# Altium PCB PCB7.pcbdoc
Units mil, origin at the board's own origin, x right, y up, seen from the top; angles counter-clockwise.
Board outline 1393.1 x 1140 mil, 2 copper layers (Top Layer, Bottom Layer); 2 components, 13 nets, 24 pads, 2 vias.
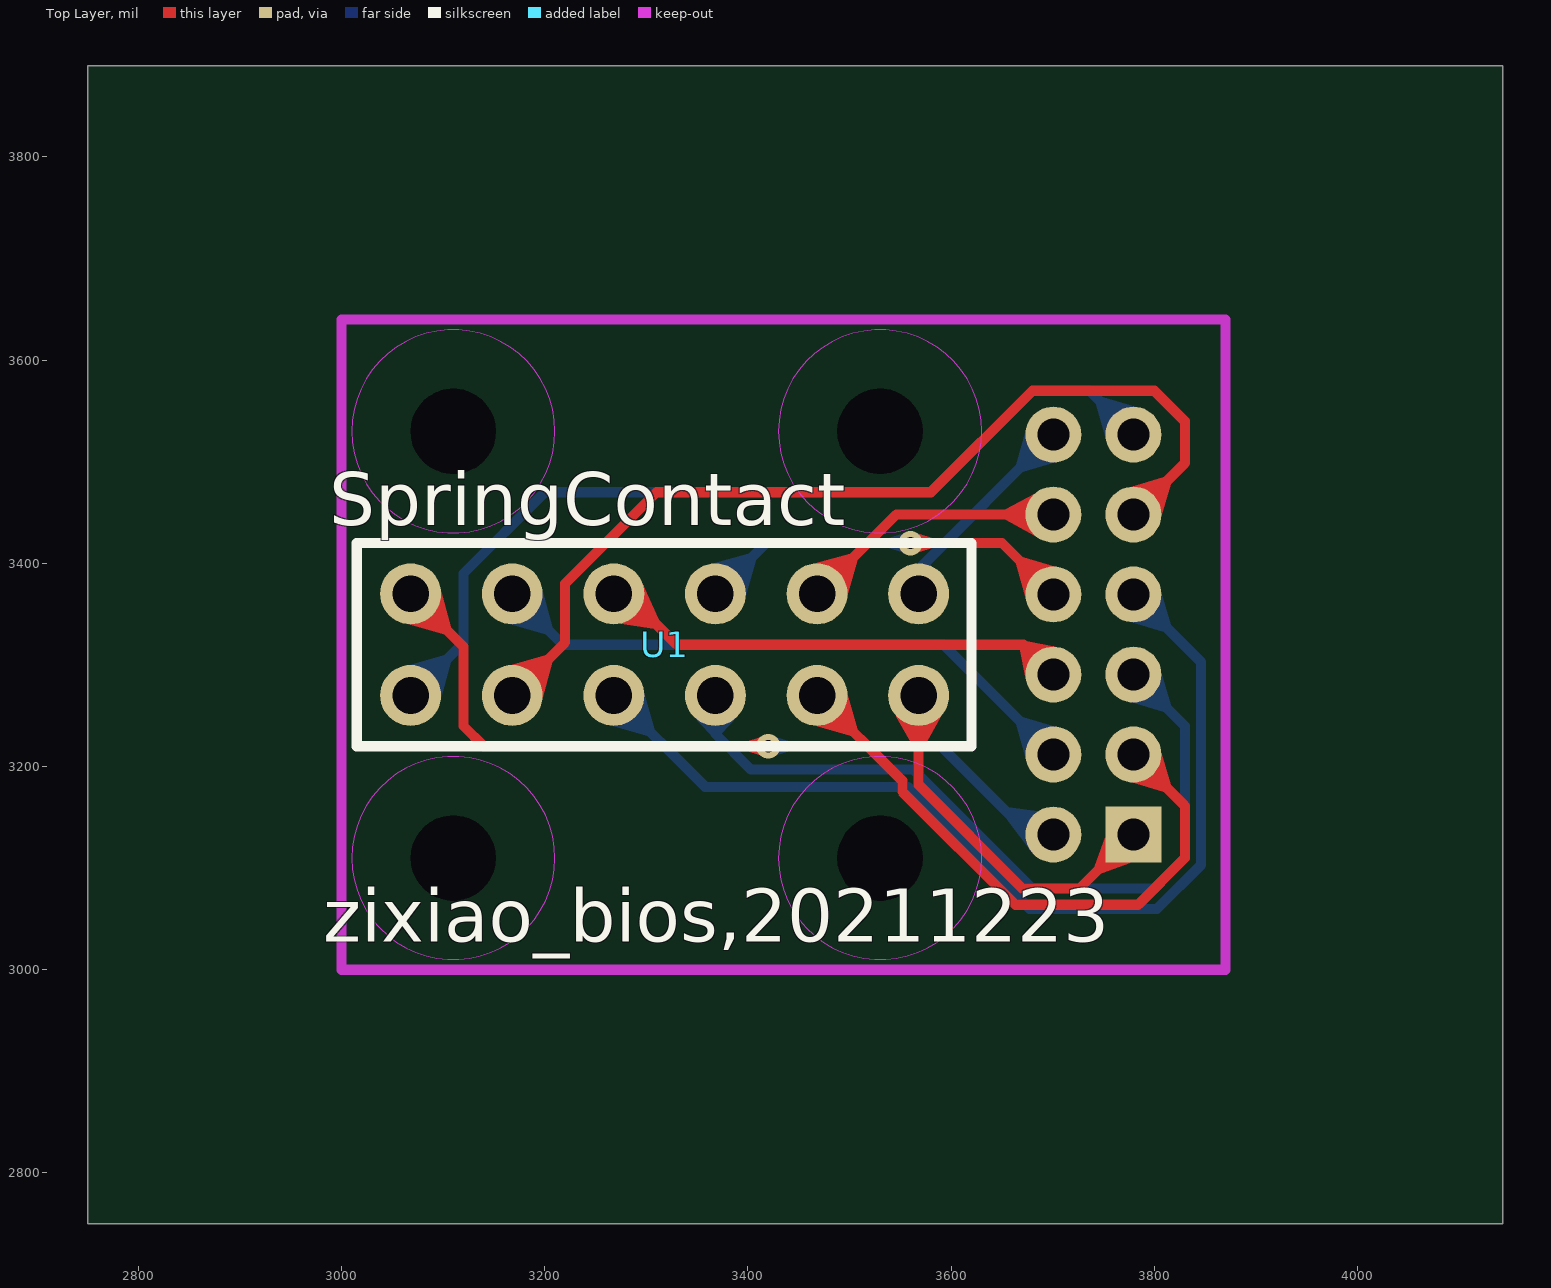
[diagram p0: Top Layer view]
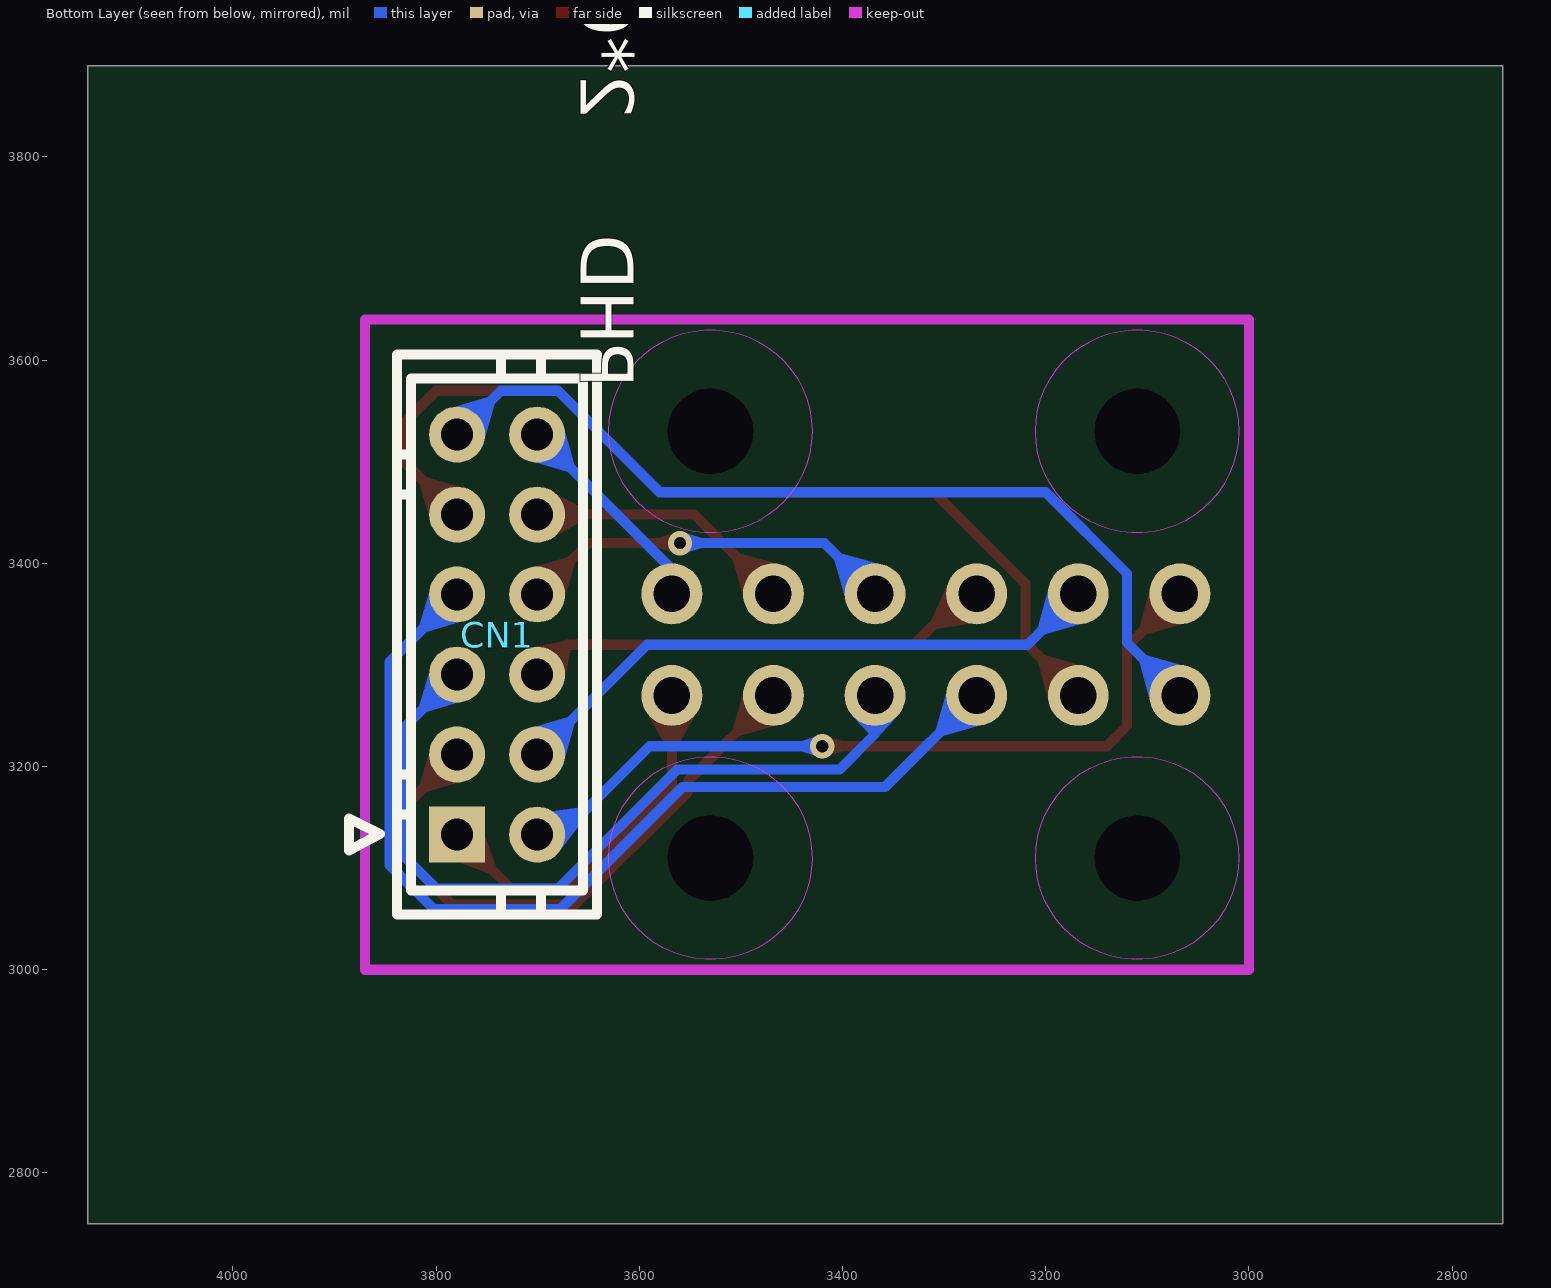
[diagram p1: Bottom Layer view, seen from below]

## Layer stack, top to bottom
Top Layer: signal copper (thickness not stored)
Dielectric: dielectric 12.6, FR-4, Dk 4.8
Bottom Layer: signal copper (thickness not stored)

## Board outline
4143.1,2750 2750,2750 2750,3890 4143.1,3890
cut-out: 3152,3530 ccw(c3110,3530) 3068,3530 ccw(c3110,3530)
cut-out: 3572,3530 ccw(c3530,3530) 3488,3530 ccw(c3530,3530)
cut-out: 3152,3110 ccw(c3110,3110) 3068,3110 ccw(c3110,3110)
cut-out: 3572,3110 ccw(c3530,3110) 3488,3110 ccw(c3530,3110)

## Components (designator, comment, footprint, x,y, rotation, side; value= is the part's Value field where it differs from the comment)
CN1 "顶盖" CONN-TH_12P-P2.00_PHD-2X6P_4 3740,3330 r270 bottom
U1 "12P 弹簧针" "12P 弹簧针" 3068,3370 r0 top

## Footprints (in the part's own frame and the unit in brackets; to place one, negate y for a bottom-side part, rotate by r counter-clockwise, add the part's x,y. Pads: shape width x height; smd on the part's side, far side on the other; paste and mask are expansions set on the pad)
"12P 弹簧针" [mil]
  round 60 hole 36: 1(0,0) 2(100,0) 3(200,0) 4(300,0) 5(400,0) 6(500,0) 7(0,-100) 8(100,-100) 9(200,-100) 10(300,-100) 11(400,-100) 12(500,-100)
  silkscreen extent -53,-150 552,50
CONN-TH_12P-P2.00_PHD-2X6P_4 [mil]
  rect 55.1x55.1 hole 31.5: 1(196.9,-39.4)
  round 55.1 hole 31.5: 2(118.1,-39.4) 3(39.4,-39.4) 4(-39.4,-39.4) 5(-118.1,-39.4) 6(-196.8,-39.4) 7(196.9,39.4) 8(118.1,39.4) 9(39.4,39.4) 10(-39.4,39.4) 11(-118.1,39.4) 12(-196.8,39.4)
  silkscreen extent -276,-146 276,98

## Via types
v1: diameter 24.02, hole 12.01, Top Layer to Bottom Layer, 2 vias

## Nets (pads, with @x,y where several pads share a name; then routed paths per layer and width w, separated by ;. In a path a pad name is that pad's centre, name@x,y a point inside that pad or via, vN(x,y) a via of type N, cw(c..) or ccw(c..) an arc to the next point about the centre after c; other vN are vias at no path point)
$1N441: CN1.1 U1.12 | length 363.6
  Top Layer w10: U1.12 3568,3182 3670,3080 3726.3,3080 CN1.1
$1N442: CN1.2 U1.11 | length 595.5
  Top Layer w10: U1.11 3552,3186 3552,3175.37 3663.37,3064 3784,3064 3830,3110 3830,3161.3 CN1.2
$1N443: CN1.3 U1.10 | length 776.9
  Bottom Layer w10: U1.10 3368,3232 3403.01,3196.99 3563.01,3196.99 3680,3080 3800,3080 3830,3110 3830,3240 CN1.3
$1N444: CN1.4 U1.9 | length 976.6
  Bottom Layer w10: U1.9 3358,3180 3557.37,3180 3677.37,3060 3802.63,3060 3846,3103.37 3846,3302.8 CN1.4
$1N445: CN1.5 U1.8 | length 945.5
  Top Layer w10: U1.8 3220,3322 3220,3380 3310,3470 3580,3470 3680,3570 3800,3570 3830,3540 3830,3498.7 CN1.5
$1N446: CN1.6 U1.7 | length 893.4
  Bottom Layer w10: U1.7 3120,3322 3120,3390 3200,3470 3580,3470 3680,3570 3736.2,3570 CN1.6
$1N447: CN1.7 U1.1 | length 776.4
  Top Layer w10: U1.1 3120,3318 3120,3240 3140,3220 v1(3420,3220)
  Bottom Layer w10: v1(3420,3220) 3590,3220 3676.9,3133.1 CN1.7
$1N454: CN1.8 U1.2 | length 598.1
  Bottom Layer w10: U1.2 3218,3320 3592.5,3320 CN1.8
$1N465: CN1.9 U1.3 | length 465.5
  Top Layer w10: U1.3 3280,3370 3330,3320 3671.2,3320 CN1.9
$1N476: CN1.12 U1.6 | length 211.7
  Bottom Layer w10: U1.6 3568,3394.2 CN1.12
$1N483: CN1.11 U1.5 | length 265
  Top Layer w10: U1.5 3546.1,3448.1 CN1.11
$1N494: CN1.10 U1.4 | length 374.3
  Top Layer w10: v1(3560,3420) 3650,3420 CN1.10
  Bottom Layer w10: U1.4 3418,3420 v1(3560,3420)
"": 

## Keep-outs
Board Outline Layer:
  lines w10 net "": 3000,3000 3870,3000 3870,3640 3000,3640 3000,3000
Multi-Layer:
  region net "": 3210,3530 ccw(c3110,3530) 3010,3530 ccw(c3110,3530)
  region net "": 3630,3530 ccw(c3530,3530) 3430,3530 ccw(c3530,3530)
  region net "": 3210,3110 ccw(c3110,3110) 3010,3110 ccw(c3110,3110)
  region net "": 3630,3110 ccw(c3530,3110) 3430,3110 ccw(c3530,3110)

## Other copper
Top Layer:
  region net $1N441: 3741.24,3102.01 3748.31,3094.94 3776.6,3105.55 3751.85,3130.3
  region net $1N442: 3777.67,3184.4 3808.98,3175.25 3816.05,3182.32 3806.9,3213.63
  region net $1N465: 3702.33,3318.1 3674.74,3323.54 3667.66,3316.46 3673.1,3288.87
  region net $1N494: 3702.33,3396.9 3671.02,3406.05 3663.95,3398.98 3673.1,3367.67
  region net $1N445: 3806.9,3446.37 3816.05,3477.68 3808.98,3484.75 3777.67,3475.6
  region net $1N483: 3682.38,3468.76 3653.76,3453.1 3653.76,3443.1 3682.38,3427.44
  region net $1N447: 3066.12,3340.06 3100.53,3330.4 3107.6,3337.47 3097.94,3371.88
  region net $1N465: 3274.67,3340.75 3307.34,3335.59 3312.32,3344.75 3296.19,3380.27
  region net $1N483: 3497.94,3368.12 3507.6,3402.53 3500.53,3409.6 3466.12,3399.94
  region net $1N445: 3197.94,3268.12 3207.6,3302.53 3200.53,3309.6 3166.12,3299.94
  region net $1N442: 3466.12,3240.06 3500.53,3230.4 3507.6,3237.47 3497.94,3271.88
  region net $1N441: 3545.5,3250.16 3563,3219 3573,3219 3590.5,3250.16
  region net $1N447: 3412.06,3229.01 3399.59,3225 3399.59,3215 3412.06,3210.99
  region net $1N494: 3567.94,3410.99 3580.41,3415 3580.41,3425 3567.94,3429.01
Bottom Layer:
  region net $1N447: 3685.24,3155.97 3656.93,3160.14 3655.28,3147.65 3679.83,3115.01
  region net $1N454: 3702.33,3239.4 3671.02,3248.55 3663.95,3241.48 3673.1,3210.17
  region net $1N443: 3777.67,3263.1 3808.98,3253.95 3816.05,3261.02 3806.9,3292.33
  region net $1N444: 3777.67,3341.9 3808.98,3332.75 3816.05,3339.82 3806.9,3371.13
  region net $1N446: 3781.13,3554.3 3749.82,3563.45 3742.75,3556.38 3751.9,3525.07
  region net $1N476: 3673.1,3528.53 3663.95,3497.22 3671.02,3490.15 3702.33,3499.3
  region net $1N454: 3166.12,3340.06 3200.53,3330.4 3207.6,3337.47 3197.94,3371.88
  region net $1N494: 3397.94,3368.12 3407.6,3402.53 3400.53,3409.6 3366.12,3399.94
  region net $1N446: 3097.94,3268.12 3107.6,3302.53 3100.53,3309.6 3066.12,3299.94
  region net $1N444: 3266.12,3240.06 3300.53,3230.4 3307.6,3237.47 3297.94,3271.88
  region net $1N443: 3345.5,3250.16 3363,3232 3373,3232 3390.5,3250.16
  region net $1N447: 3427.94,3210.99 3440.41,3215 3440.41,3225 3427.94,3229.01
  region net $1N494: 3552.06,3429.01 3539.59,3425 3539.59,3415 3552.06,3410.99

## Silkscreen, mask and mechanical layers (free items; w line width, h text height)
Top Silkscreen Layer:
  text "zixiao_bios,20211223" at 2981.81,3027.76 h51.92
Mechanical Layer:
  circle w1 net "": c3110,3530 r42
  circle w1 net "": c3530,3530 r42
  circle w1 net "": c3110,3110 r42
  circle w1 net "": c3530,3110 r42

## Text inside footprints (layer, text, board x,y; h text height)
CN1: Bottom Silkscreen Layer "PHD     2*6" at 3657.76,3572.33 h51.92 r90
U1: Top Silkscreen Layer "SpringContact" at 2987.77,3437.76 h51.92